# EAGLE board Shield-Proteco (EAGLE 8.0.1)
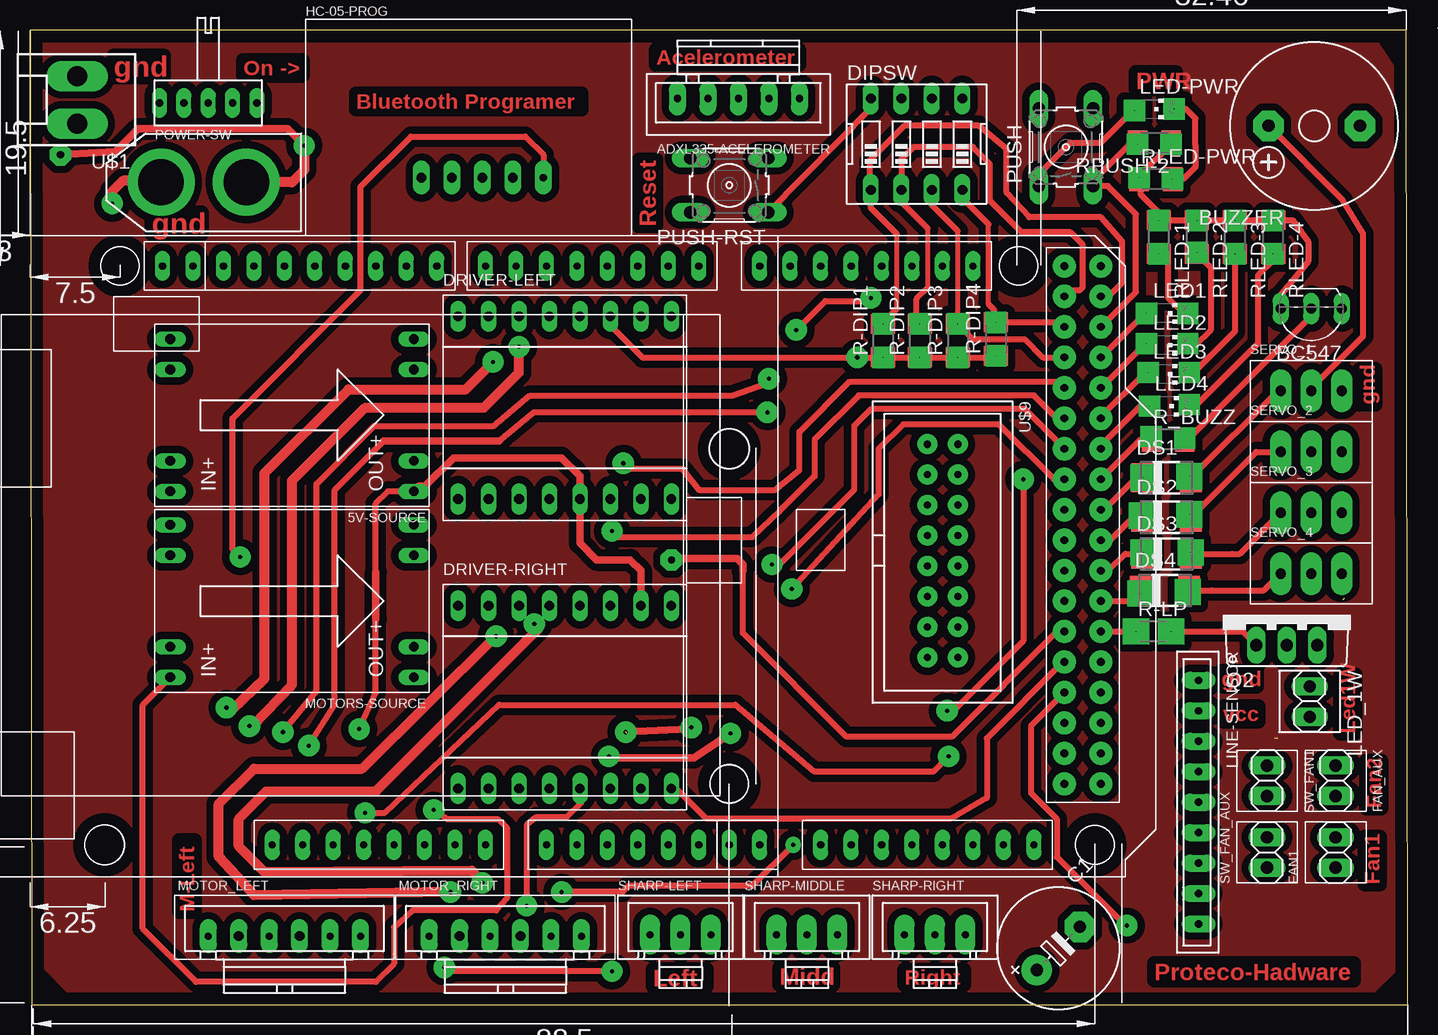
[diagram p0: board, top side]
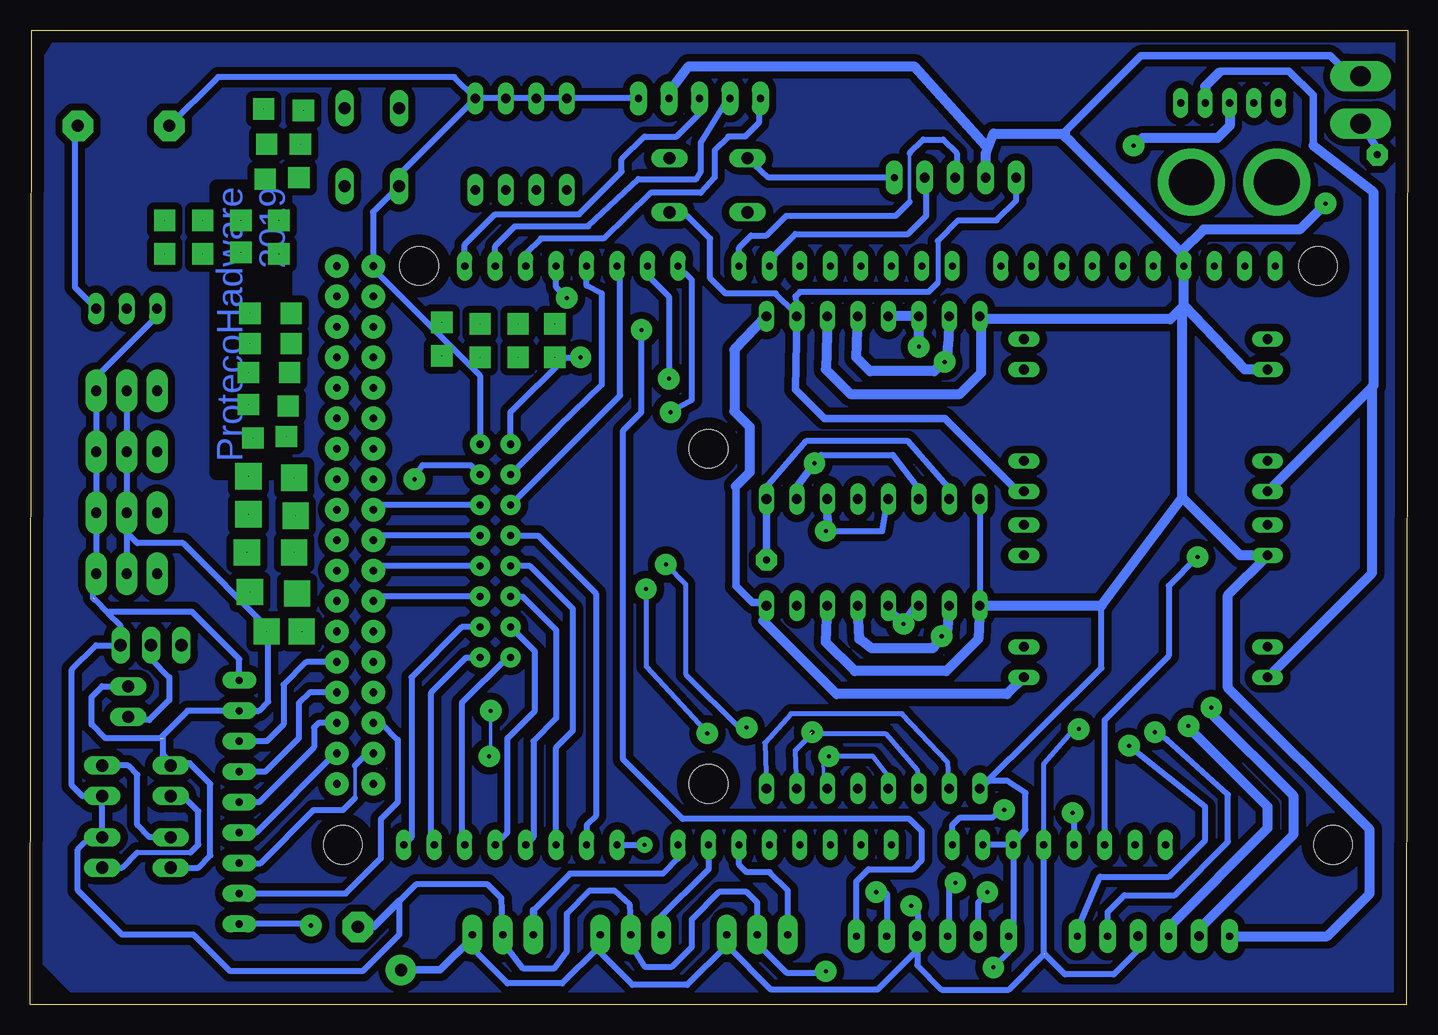
[diagram p1: board, bottom side, seen from below]

Size 114.86 x 81.27 mm. Coordinates in mm from the lower left corner, seen from the top.
Outline: 0.13,0 114.86,0 114.73,81.27 0,81.27 0.13,0
Copper layers (1*16): Top 0.035mm / dielectric 1.5mm / Bottom 0.035mm
Design rules "default": minimum track width 6mil, minimum drill 0.35mm, track to track 6mil, track to pad 6mil, pad to pad 6mil, via to via 6mil, smd to smd 6mil, copper to edge 40mil, drill to drill 6mil, minimum pad ring 10mil, minimum via ring 8mil, stop-mask expansion 4mil, vias tented up to drill 0mil, thermal gap 10mil

## Footprints (pad centres in the part's own frame; a part is rotated, then mirrored left to right if it is on the bottom)
STEPDOWN-DC-DC = drill 0.8 long: IN2+ -3.81,10.16; IN2- 6.35,10.16; IN+ -6.35,10.16; IN- 3.81,10.16; OUT2+ -3.81,-10.16; OUT2- 6.35,-10.16; OUT+ -6.35,-10.16; OUT- 3.81,-10.16
ACELEROMETER-MPU6050-JST-5 = drill 0.6 pad 1.422 long: GND -2.54,0; INT 5.08,0; SCL 0,0; SDA 2.54,0; VCC -5.08,0
ARDUINO-MEGA = drill 0.6 pad 1.27 long: 0-RX0 14.224,25.4; 1-TX0 11.684,25.4; 2 9.144,25.4; 3 6.604,25.4; 3V3 -13.716,-22.86; 4 4.064,25.4; 5 1.524,25.4; 5V_1 -11.176,-22.86; 6 -1.016,25.4; 7 -3.556,25.4; 8 -7.62,25.4; 9 -10.16,25.4; 10 -12.7,25.4; 11 -15.24,25.4; 12 -17.78,25.4; 13 -20.32,25.4; 14-TX3 19.304,25.4; 15-RX3 21.844,25.4; 16-TX2 24.384,25.4; 17-RX2 26.924,25.4; 18-TX1 29.464,25.4; 19-RX1 32.004,25.4; 20 34.544,25.4; 21 37.084,25.4; A0 1.524,-22.86; A1 4.064,-22.86; A2 6.604,-22.86; A3 9.144,-22.86; A4 11.684,-22.86; A5 14.224,-22.86; A6 16.764,-22.86; A7 19.304,-22.86; A8 24.384,-22.86; A9 26.924,-22.86; A10 29.464,-22.86; A11 32.004,-22.86; A12 34.544,-22.86; A13 37.084,-22.86; A14 39.624,-22.86; A15 42.164,-22.86; AREF -25.4,25.4; GND -22.86,25.4; GND_1 -6.096,-22.86; GND_2 -8.636,-22.86; IOREF -18.796,-22.86; NC -21.336,-22.86; RESET -16.256,-22.86; SCL -30.48,25.4; SDA -27.94,25.4; VIN -3.556,-22.86 | drill 0.65 pad 1.93: 5V_2 47.752,25.4; 5V_3 44.704,25.4; 22 44.704,22.86; 23 47.752,22.86; 24 44.704,20.32; 25 47.752,20.32; 26 44.704,17.78; 27 47.752,17.78; 28 44.704,15.24; 29 47.752,15.24; 30 44.704,12.7; 31 47.752,12.7; 32 44.704,10.16; 33 47.752,10.16; 34 44.704,7.62; 35 47.752,7.62; 36 44.704,5.08; 37 47.752,5.08; 38 44.704,2.54; 39 47.752,2.54; 40 44.704,0; 41 47.752,0; 42 44.704,-2.54; 43 47.752,-2.54; 44 44.704,-5.08; 45 47.752,-5.08; 46 44.704,-7.62; 47 47.752,-7.62; 48 44.704,-10.16; 49 47.752,-10.16; 50 44.704,-12.7; 51 47.752,-12.7; 52 44.704,-15.24; 53 47.752,-15.24; GND_3 47.752,-17.78; GND_4 44.704,-17.78 | hole 3.2: 47.244,-22.86; -34.036,25.4; 40.894,25.4; -35.306,-22.86; 16.764,10.16; 16.764,-17.78
TO92-CBE = drill 0.813 long: B 0,0; C -2.54,0; E 2.54,0
F/CM12P = drill 1.016 pad 2.54 octagon: + 3.81,0; - -3.81,0
E5-10,5 = drill 1.016 pad 2.54: + -2.54,0 | drill 1.016 pad 2.54 octagon: - 2.54,0
EDG-04 = drill 0.813 long: 1 -3.81,-3.81; 2 -1.27,-3.81; 3 1.27,-3.81; 4 3.81,-3.81; 5 3.81,3.81; 6 1.27,3.81; 7 -1.27,3.81; 8 -3.81,3.81
TB6612FNG = drill 0.8 long: AI1 6.35,3.81; AI2 6.35,6.35; AO1 -8.89,1.27; AO2 -8.89,-1.27; BI1 6.35,-1.27; BI2 6.35,-3.81; BO1 -8.89,-6.35; BO2 -8.89,-3.81; GND -8.89,3.81; GND_1 -8.89,-8.89; GND_2 6.35,-8.89; PWMA 6.35,8.89; PWMB 6.35,-6.35; STBY 6.35,1.27; VCC -8.89,6.35; VM -8.89,8.89
DO-214AC = smd 1.8 x 2.4: A 2.025,0; C -2.025,0
1X02 = drill 1.016 long: GND 1.27,0; VCC -1.27,0
HC-05-PROG-COMP = drill 0.8 pad 1.422 long: GND -1.27,-4.064; RXD 3.81,-4.064; TXD 1.27,-4.064; VCC -3.81,-4.064 | drill 0.6 pad 1.422 long: RESET 6.35,-4.064
CHIPLED_1206 = smd 1.5 x 1.5: A 0,-1.75; C 0,1.75
1X02' = drill 1.016 long: 1 -1.27,0; 2 1.27,0
CNY70-ARRAY-HEADER = drill 0.6 pad 1.422 long: GND -10.16,0; SCD 7.62,0; SCI -5.08,0; SF 10.16,0; SID 2.54,0; SII 0,0; SSD 5.08,0; SSI -2.54,0; VCC -7.62,0
JST = drill 0.6 pad 1.422 long: GND -6.35,0; M1 6.35,0; M2 3.81,0; OUTA -1.27,0 | drill 0.8 pad 1.422 long: OUTB -3.81,0; VCC 1.27,0
SLIDE-3 = drill 0.6 pad 1.27 long: COM 0,0; P1 -2.032,0; P2 2.032,0; P3 -4.064,0; P4 4.064,0
B3F-10XX = drill 1.016 long: 1 -3.251,2.261; 2 3.251,2.261; 3 -3.251,-2.261; 4 3.251,-2.261
TO220AV = drill 1.016 long: B -2.54,-2.54; C 0,-2.54; E 2.54,-2.54
M1206 = smd 1.6 x 2: 1 -1.4,0; 2 1.4,0
SERVO = drill 0.85 pad 1.778 long: GND 2.54,0; SIGNAL -2.54,0; VCC 0,0
SHARP = drill 0.6 pad 1.676 long: DIST -2.54,0; GND 0,0; VCC 2.54,0
KK-156-2 = drill 1.7 pad 2.184 long: GND 1.98,0; VCC -1.98,0
SENSOR-MISCELANEOUS = drill 0.6 pad 1.676: 3V3 -6.35,1.27; E1 -6.35,-1.27; E2 -3.81,1.27; E3 -3.81,-1.27; E4 -1.27,1.27; E5 -1.27,-1.27; E6 1.27,1.27; E7 1.27,-1.27; E8 3.81,1.27; E9 3.81,-1.27; E10 6.35,1.27; E11 6.35,-1.27; E12 8.89,1.27; E13 8.89,-1.27; GND -8.89,-1.27; VCC -8.89,1.27
TFT-ARDUINO-UNO-MEGA = drill 0.6 pad 1.27 long: 0-RX0 29.464,26.67; 1-TX0 26.924,26.67; 2 24.384,26.67; 3 21.844,26.67; 3V3 1.524,-21.59; 4 19.304,26.67; 5 16.764,26.67; 5V_1 4.064,-21.59; 6 14.224,26.67; 7 11.684,26.67; 8 7.62,26.67; 9 5.08,26.67; 10 2.54,26.67; 11 0,26.67; 12 -2.54,26.67; 13 -5.08,26.67; A0 16.764,-21.59; A1 19.304,-21.59; A2 21.844,-21.59; A3 24.384,-21.59; A4 26.924,-21.59; A5 29.464,-21.59; AREF -10.16,26.67; GND -7.62,26.67; GND_1 9.144,-21.59; GND_2 6.604,-21.59; IOREF -3.556,-21.59; NC -6.096,-21.59; RESET -1.016,-21.59; VIN 11.684,-21.59
XT60 = drill 3.81 pad 5.588: GND 7.112,0; VCC 0,0

## Placement (x,y rotation side)
5V-SOURCE  STEPDOWN-DC-DC  [STEPDOWN-DC-DC]  21.84,49.15 90 top
ADXL335-ACELEROMETER  ACELEROMETER-JST-5  [ACELEROMETER-MPU6050-JST-5]  59.05,75.57 180 top
ARDUINO-MEGA  ARDUINO_MEGA  [ARDUINO-MEGA]  41.53,36.2 0 top
BC547  [TO92-CBE]  106.81,58.04 180 top
BUZZER  F/CM12P  [F/CM12P]  107.06,73.28 180 top
C1  [E5-10,5]  85.72,4.7 45 top
DIPSW  [EDG-04]  73.91,71.76 0 top
DRIVER-LEFT  TB6612FNG  [TB6612FNG]  44.58,48.51 270 top
DRIVER-RIGHT  TB6612FNG  [TB6612FNG]  44.58,24.38 270 top
DS1  [DO-214AC]  94.74,43.94 0 top
DS2  [DO-214AC]  94.74,40.64 0 top
DS3  [DO-214AC]  94.74,37.59 0 top
DS4  [DO-214AC]  94.61,34.54 0 top
FAN1  FAN-MOLEX  [1X02]  108.84,12.7 90 top
FAN_AUX  FAN-MOLEX  [1X02]  108.84,18.67 270 top
HC-05-PROG  HC-05-PROGRAMER  [HC-05-PROG-COMP]  36.45,73.03 0 top
LED1  [CHIPLED_1206]  94.87,57.66 270 top
LED2  [CHIPLED_1206]  94.87,54.99 270 top
LED3  [CHIPLED_1206]  94.87,52.58 270 top
LED4  [CHIPLED_1206]  95,49.91 270 top
LED-PWR  [CHIPLED_1206]  93.73,74.68 270 top
LED_1W  LED-1W-3V3  [1X02']  106.68,25.27 270 top
LINE-SENSOR  CNY70-ARRAY-HEADER  [CNY70-ARRAY-HEADER]  97.41,16.89 270 top
MOTOR_LEFT  POLOLU-MICROMOTOR  [JST]  21.21,5.71 0 top
MOTOR_RIGHT  POLOLU-MICROMOTOR  [JST]  39.62,5.71 0 top
MOTORS-SOURCE  STEPDOWN-DC-DC  [STEPDOWN-DC-DC]  21.84,33.66 90 top
POWER-SW  SLIDE-3  [SLIDE-3]  14.86,75.18 0 top
PUSH  [B3F-10XX]  86.36,71.5 90 top
PUSH-RST  [B3F-10XX]  58.29,68.33 180 top
Q2  TIP41C  [TO220AV]  104.78,32.51 0 top
R-DIP1  [M1206]  71.12,55.37 90 top
R-DIP2  [M1206]  74.17,55.37 90 top
R-DIP3  [M1206]  77.34,55.37 90 top
R-DIP4  [M1206]  80.52,55.5 90 top
R-LP  [M1206]  93.6,31.11 0 top
R_BUZZ  [M1206]  94.87,47.12 0 top
RLED-1  [M1206]  94.11,64.01 270 top
RLED-2  [M1206]  97.28,64.01 270 top
RLED-3  [M1206]  100.46,64.01 270 top
RLED-4  [M1206]  103.63,64.01 270 top
RLED-PWR  [M1206]  93.85,68.83 0 top
RPUSH-2  [M1206]  93.73,71.88 180 top
SERVO_1  SERVOMOTORES  [SERVO]  106.81,51.18 0 top
SERVO_2  SERVOMOTORES  [SERVO]  106.81,46.1 0 top
SERVO_3  SERVOMOTORES  [SERVO]  106.81,41.02 0 top
SERVO_4  SERVOMOTORES  [SERVO]  106.81,35.94 0 top
SHARP-LEFT  SHARP  [SHARP]  54.23,5.84 0 top
SHARP-MIDDLE  SHARP  [SHARP]  64.77,5.84 0 top
SHARP-RIGHT  SHARP  [SHARP]  75.44,5.84 0 top
SW_FAN1  SW-HEAD  [1X02']  103.12,18.67 270 top
SW_FAN_AUX  SW-HEAD  [1X02']  103.12,12.7 90 top
U$1  LIPO7.4MOLEX  [KK-156-2]  3.94,75.44 90 top
U$9  SENSOR-MISCELANEOUS  [SENSOR-MISCELANEOUS]  76.07,37.85 270 top
U$14  TFT_ARDUINO-UNO-MEGA  [TFT-ARDUINO-UNO-MEGA]  26.29,34.92 0 top
U$23  ZIIPY-7.4V  [XT60]  18.03,68.58 180 top

## Library data of the parts
5V-SOURCE MOTORS-SOURCE = Reguladores
ADXL335-ACELEROMETER LINE-SENSOR SHARP-LEFT SHARP-MIDDLE SHARP-RIGHT U$9 = Sensores
ARDUINO-MEGA = Arduino
BC547 = transistor
BUZZER = buzzer; OC_FARNELL: unknown; OC_NEWARK: unknown
C1 = rcl
DIPSW = special
DRIVER-LEFT DRIVER-RIGHT = Driver-Motor
DS1-DS4 = diode
FAN1 FAN_AUX = Ventilador
HC-05-PROG = hc-xx
LED1-LED4 LED-PWR = led
LED_1W = LedPower
MOTOR_LEFT MOTOR_RIGHT SERVO_1-SERVO_4 = Motores
POWER-SW SW_FAN1 SW_FAN_AUX = Interruptores
PUSH PUSH-RST = switch-omron; MPN: B3F-1000; OC_FARNELL: 176432; OC_NEWARK: 36M3542
Q2 = transistor-power
R-DIP1-R-DIP4 R-LP R_BUZZ RLED-1-RLED-4 RLED-PWR RPUSH-2 = rcl; SPICEPREFIX: R
U$1 U$23 = Baterias
U$14 = TFT

## Nets
3V3: ARDUINO-MEGA.3V3 U$9.3V3 U$14.3V3
6V-DC-3A: DRIVER-LEFT.VM DRIVER-RIGHT.VM MOTORS-SOURCE.OUT+
A9: ARDUINO-MEGA.A9 U$9.E5
A10: ARDUINO-MEGA.A10 U$9.E7
A11: ARDUINO-MEGA.A11 U$9.E9
A12: ARDUINO-MEGA.A12 U$9.E11
A13: ARDUINO-MEGA.A13 U$9.E13
A14: ARDUINO-MEGA.A14 U$9.E12
A15: ARDUINO-MEGA.A15 U$9.E10
AREF: ARDUINO-MEGA.AREF U$14.AREF
BUZZER: ARDUINO-MEGA.35 R_BUZZ.1
D36: ARDUINO-MEGA.36 U$9.E2
D38: ARDUINO-MEGA.38 U$9.E4
D40: ARDUINO-MEGA.40 U$9.E6
D42: ARDUINO-MEGA.42 U$9.E8
DIP1: ARDUINO-MEGA.23 DIPSW.1 R-DIP1.2
DIP2: ARDUINO-MEGA.22 DIPSW.2 R-DIP2.2
DIP3: ARDUINO-MEGA.26 DIPSW.3 R-DIP3.2
DIP4: ARDUINO-MEGA.24 DIPSW.4 R-DIP4.2
ENC1-LEFT: ARDUINO-MEGA.14-TX3 MOTOR_LEFT.M1
ENC1-RIGHT: ARDUINO-MEGA.18-TX1 MOTOR_RIGHT.M1
ENC2-LEFT: ARDUINO-MEGA.15-RX3 MOTOR_LEFT.M2
ENC2-RIGHT: ARDUINO-MEGA.A8 MOTOR_RIGHT.M2
GND: 5V-SOURCE.IN- ADXL335-ACELEROMETER.GND ARDUINO-MEGA.GND ARDUINO-MEGA.GND_1 ARDUINO-MEGA.GND_2 BC547.E C1.- DRIVER-LEFT.GND DRIVER-LEFT.GND_1 DRIVER-LEFT.GND_2 DRIVER-RIGHT.GND DRIVER-RIGHT.GND_1 DRIVER-RIGHT.GND_2 FAN1.GND FAN_AUX.GND HC-05-PROG.GND LINE-SENSOR.GND MOTOR_LEFT.GND MOTOR_RIGHT.GND MOTORS-SOURCE.IN- Q2.E R-DIP1.1 R-DIP2.1 R-DIP3.1 R-DIP4.1 RLED-1.1 RLED-2.1 RLED-3.1 RLED-4.1 RLED-PWR.1 RPUSH-2.1 SERVO_1.GND SERVO_2.GND SERVO_3.GND SERVO_4.GND SHARP-LEFT.GND SHARP-MIDDLE.GND SHARP-RIGHT.GND U$1.GND U$9.GND U$14.GND U$14.GND_1 U$14.GND_2 U$23.GND
IN1-MOTOR-LEFT: ARDUINO-MEGA.30 DRIVER-LEFT.AI1 DRIVER-LEFT.BI1
IN1-MOTOR-RIGHT: ARDUINO-MEGA.32 DRIVER-RIGHT.AI2 DRIVER-RIGHT.BI2
IN2-MOTOR-LEFT: ARDUINO-MEGA.28 DRIVER-LEFT.AI2 DRIVER-LEFT.BI2
IN2-MOTOR-RIGHT: ARDUINO-MEGA.34 DRIVER-RIGHT.AI1 DRIVER-RIGHT.BI1
INT: ADXL335-ACELEROMETER.INT ARDUINO-MEGA.19-RX1
IOREF: ARDUINO-MEGA.IOREF U$14.IOREF
LCD_CS: ARDUINO-MEGA.A3 U$14.A3
LCD_D0: ARDUINO-MEGA.8 U$14.8
LCD_D1: ARDUINO-MEGA.9 U$14.9
LCD_D2: ARDUINO-MEGA.2 U$14.2
LCD_D3: ARDUINO-MEGA.3 U$14.3
LCD_D4: ARDUINO-MEGA.4 U$14.4
LCD_D5: ARDUINO-MEGA.5 U$14.5
LCD_D6: ARDUINO-MEGA.6 U$14.6
LCD_D7: ARDUINO-MEGA.7 U$14.7
LCD_RD: ARDUINO-MEGA.A0 U$14.A0
LCD_RS: ARDUINO-MEGA.A2 U$14.A2
LCD_RST: ARDUINO-MEGA.A4 U$14.A4
LCD_WR: ARDUINO-MEGA.A1 U$14.A1
LED1: ARDUINO-MEGA.27 LED1.A
LED1W: ARDUINO-MEGA.45 R-LP.1
LED2: ARDUINO-MEGA.29 LED2.A
LED3: ARDUINO-MEGA.31 LED3.A
LED4: ARDUINO-MEGA.33 LED4.A
N$1: LED_1W.2 Q2.C
N$2: Q2.B R-LP.2
N$5: BC547.C BUZZER.-
N$6: BC547.B R_BUZZ.2
N$15: FAN_AUX.VCC SW_FAN_AUX.2
N$23: LED1.C RLED-1.2
N$24: LED2.C RLED-2.2
N$25: LED3.C RLED-3.2
N$26: LED4.C RLED-4.2
N$75: DS4.A SERVO_4.SIGNAL
N$76: DS3.A SERVO_3.SIGNAL
N$77: DS2.A SERVO_2.SIGNAL
N$89: LED-PWR.C RLED-PWR.2
N$127: DS1.A SERVO_1.SIGNAL
N$128: FAN1.VCC SW_FAN1.2
N$134: POWER-SW.COM U$1.VCC U$23.VCC
NC: ARDUINO-MEGA.NC U$14.NC
OUT1-MOTOR-LEFT: DRIVER-LEFT.AO1 DRIVER-LEFT.BO1 MOTOR_LEFT.OUTB
OUT1-MOTOR-RIGHT: DRIVER-RIGHT.AO1 DRIVER-RIGHT.BO1 MOTOR_RIGHT.OUTB
OUT2-MOTOR-LEFT: DRIVER-LEFT.AO2 DRIVER-LEFT.BO2 MOTOR_LEFT.OUTA
OUT2-MOTOR-RIGHT: DRIVER-RIGHT.AO2 DRIVER-RIGHT.BO2 MOTOR_RIGHT.OUTA
PUSH: ARDUINO-MEGA.25 PUSH.3 RPUSH-2.2
PWM-MOTOR-LEFT: ARDUINO-MEGA.44 DRIVER-LEFT.PWMA DRIVER-LEFT.PWMB
PWM-MOTOR-RIGHT: ARDUINO-MEGA.46 DRIVER-RIGHT.PWMA DRIVER-RIGHT.PWMB
RESET: ARDUINO-MEGA.RESET HC-05-PROG.RESET PUSH-RST.4 U$14.RESET
RX0: ARDUINO-MEGA.0-RX0 HC-05-PROG.TXD U$14.0-RX0
RX2: ARDUINO-MEGA.17-RX2 U$9.E1
SCD: ARDUINO-MEGA.50 LINE-SENSOR.SCD
SCI: ARDUINO-MEGA.47 LINE-SENSOR.SCI
SCL: ADXL335-ACELEROMETER.SCL ARDUINO-MEGA.21
SD_DI: ARDUINO-MEGA.11 U$14.11
SD_DO: ARDUINO-MEGA.12 U$14.12
SD_SCK: ARDUINO-MEGA.13 U$14.13
SD_SS: ARDUINO-MEGA.10 U$14.10
SDA: ADXL335-ACELEROMETER.SDA ARDUINO-MEGA.20
SERVO1: ARDUINO-MEGA.37 DS1.C
SERVO2: ARDUINO-MEGA.39 DS2.C
SERVO3: ARDUINO-MEGA.41 DS3.C
SERVO4: ARDUINO-MEGA.43 DS4.C
SF: ARDUINO-MEGA.48 LINE-SENSOR.SF
SHARP-LEFT: ARDUINO-MEGA.A5 SHARP-LEFT.DIST U$14.A5
SHARP-MIDDLE: ARDUINO-MEGA.A6 SHARP-MIDDLE.DIST
SHARP-RIGHT: ARDUINO-MEGA.A7 SHARP-RIGHT.DIST
SID: ARDUINO-MEGA.53 LINE-SENSOR.SID
SII: ARDUINO-MEGA.51 LINE-SENSOR.SII
SSD: ARDUINO-MEGA.52 LINE-SENSOR.SSD
SSI: ARDUINO-MEGA.49 LINE-SENSOR.SSI
TX0: ARDUINO-MEGA.1-TX0 HC-05-PROG.RXD U$14.1-TX0
TX2: ARDUINO-MEGA.16-TX2 U$9.E3
VCC: 5V-SOURCE.OUT+ ADXL335-ACELEROMETER.VCC ARDUINO-MEGA.5V_1 BUZZER.+ C1.+ DIPSW.5 DIPSW.6 DIPSW.7 DIPSW.8 DRIVER-LEFT.STBY DRIVER-LEFT.VCC DRIVER-RIGHT.STBY DRIVER-RIGHT.VCC HC-05-PROG.VCC LED-PWR.A LED_1W.1 LINE-SENSOR.VCC MOTOR_LEFT.VCC MOTOR_RIGHT.VCC PUSH-RST.1 PUSH.1 SERVO_1.VCC SERVO_2.VCC SERVO_3.VCC SERVO_4.VCC SHARP-LEFT.VCC SHARP-MIDDLE.VCC SHARP-RIGHT.VCC SW_FAN1.1 SW_FAN_AUX.1 U$9.VCC U$14.5V_1
VIN: 5V-SOURCE.IN+ ARDUINO-MEGA.VIN MOTORS-SOURCE.IN+ POWER-SW.P2 U$14.VIN

## Tracks (layer width: path | path; a pad name or v marks a point on that pad's centre or on a via)
3V3  (via drill 0.35 pad 1.78)
  Top 0.305: 76.96,24.51 v76.45,24.51 76.33,24.51
  Top 0.508: v27.94,16 29.59,16 39.12,25.02 58.8,25.02 65.41,19.43 75.31,19.43 v76.58,20.7 | v82.8,43.81 82.8,30.35 76.96,24.51
  Bottom 0.305: 28.07,15.88 v27.94,16 | 82.8,44.07 v82.8,43.81 | v76.45,24.51 76.45,20.83 v76.58,20.7
  Bottom 0.508: U$14.3V3 27.81,15.62 28.07,15.88 | 82.8,44.07 82.17,44.96 78.11,44.96 U$9.3V3
6V-DC-3A
  Bottom 0.61: 56.01,43.24 56.01,34.92 54.61,33.53 53.72,33.53 | 53.72,33.53 DRIVER-RIGHT.VM | DRIVER-RIGHT.VM 53.72,33.53 | DRIVER-RIGHT.VM 53.47,32.26 53.72,32
  Bottom 0.813: 53.72,32 47.62,25.91 33.4,25.91 MOTORS-SOURCE.OUT+ | DRIVER-LEFT.VM 56.13,54.61 56.13,49.47 54.86,48.2 54.86,44.38 56.01,43.24
A9
  Bottom 0.508: U$9.E5 72.52,39.12 67.69,34.29 67.69,15.75 68.45,14.99 ARDUINO-MEGA.A9
A10
  Bottom 0.508: ARDUINO-MEGA.A10 70.99,21.46 69.6,22.86 69.6,33.02 73.15,36.58 U$9.E7
A11
  Bottom 0.508: U$9.E9 73.79,34.04 70.99,31.24 70.99,23.88 72.9,21.97 72.9,13.97 ARDUINO-MEGA.A11
A12
  Bottom 0.508: U$9.E11 72.77,29.46 72.77,24.51 75.06,22.22 75.06,14.35 ARDUINO-MEGA.A12
A13
  Bottom 0.305: U$9.E13 75.06,28.96
  Bottom 0.508: 75.06,28.96 78.87,25.15 78.87,13.59 ARDUINO-MEGA.A13
A14
  Bottom 0.305: ARDUINO-MEGA.A14 81.41,13.59
  Bottom 0.508: 81.41,13.59 81.41,26.04 78.49,28.96 U$9.E12
A15
  Bottom 0.508: ARDUINO-MEGA.A15 83.06,13.97 83.06,27.3 78.87,31.5 U$9.E10
BUZZER
  Top 0.305: 92.58,47.12 R_BUZZ.1
  Top 0.508: ARDUINO-MEGA.35 92.58,47.12
D36
  Bottom 0.305: 85.85,41.66 ARDUINO-MEGA.36
  Bottom 0.508: U$9.E2 85.85,41.66
D38
  Bottom 0.305: 85.85,39.12 ARDUINO-MEGA.38
  Bottom 0.508: U$9.E4 85.85,39.12
D40
  Bottom 0.305: 85.85,36.58 ARDUINO-MEGA.40
  Bottom 0.508: U$9.E6 85.85,36.58
D42
  Bottom 0.305: 85.85,34.04 ARDUINO-MEGA.42
  Bottom 0.508: U$9.E8 85.85,34.04
DIP1
  Top 0.152: 69.98,68.07 DIPSW.1
  Top 0.305: R-DIP1.2 71.5,57.15 71.5,57.28 | ARDUINO-MEGA.23 89.92,59.05
  Top 0.406: 72.26,58.04 72.26,64.26
  Top 0.508: 71.5,57.28 72.26,58.04 | 72.26,64.26 70.1,66.42 DIPSW.1 | 69.98,68.07 69.98,70.36 72.9,73.28 79.12,73.28 81.41,71.37 81.41,67.69 83.31,65.66 89.28,65.66 91.06,63.63 91.06,60.2 89.92,59.05
DIP2
  Top 0.305: R-DIP2.2 73.91,57.03 | ARDUINO-MEGA.22 86.74,59.56
  Top 0.406: 74.85,59.81 74.85,64.72
  Top 0.508: 73.91,57.03 73.91,58.87 74.85,59.81 | 74.85,64.72 72.64,66.93 DIPSW.2 72.64,70.48 73.66,71.5 78.61,71.5 80.01,70.1 80.01,67.06 82.65,64.41 86.72,64.41 87.76,63.37 87.76,59.82 87.5,59.56 86.74,59.56
DIP3
  Top 0.152: R-DIP3.2 77.47,56.77
  Top 0.406: R-DIP3.2 77.34,64.52
  Top 0.508: 77.34,64.52 75.18,66.68 DIPSW.3 | R-DIP3.2 78.62,55.5 82.93,55.5 84.45,53.98 ARDUINO-MEGA.26
DIP4
  Top 0.152: ARDUINO-MEGA.24 86.11,56.52 85.34,56.52
  Top 0.305: R-DIP4.2 80.39,57.03 | 85.72,56.9 86.11,56.52 | 77.72,67.25 DIPSW.4
  Top 0.406: 79.91,58.42 79.91,65.06
  Top 0.508: 79.91,65.06 77.72,67.25 | 80.39,57.03 80.39,57.93 79.91,58.42 | R-DIP4.2 85.72,56.9
ENC1-LEFT  (via drill 0.35 pad 1.78)
  Top 0.305: 61.21,49.4 v61.47,49.4
  Top 0.508: v23.24,21.59 25.4,25.02 25.4,42.93 29.46,46.99 | 39.12,46.99 42.04,49.4 61.21,49.4
  Top 0.61: 29.46,46.99 39.12,46.99
  Bottom 0.305: v61.47,49.4 61.59,49.4
  Bottom 0.508: MOTOR_LEFT.M1 27.18,7.11 25.65,10.67 19.94,10.67 16.89,13.72 16.89,16.51 v23.24,21.59 | 61.59,49.4 59.69,50.42 59.69,60.45 ARDUINO-MEGA.14-TX3
ENC1-RIGHT  (via drill 0.35 pad 1.78)
  Top 0.305: 70.1,58.67 v70.1,58.93
  Top 0.508: v63.88,56.26 66.29,58.67 70.1,58.67
  Bottom 0.305: 70.99,60.58 ARDUINO-MEGA.18-TX1
  Bottom 0.508: 70.99,60.58 70.99,59.82 v70.1,58.93 | MOTOR_RIGHT.M1 45.97,10.29 44.96,11.3 41.27,11.3 40.51,12.07 40.51,14.48 41.53,15.49 60.45,15.49 65.41,20.45 65.41,47.88 63.88,49.4 63.88,55.5 v63.88,56.26
ENC2-LEFT  (via drill 0.35 pad 1.78)
  Top 0.305: 61.47,51.82 v61.59,52.2
  Top 0.508: v21.08,22.73 23.88,26.16 23.88,43.43 28.7,48.26 38.63,48.26 41.65,50.77 58.52,50.77 61.47,51.82
  Bottom 0.305: 63.37,60.83 ARDUINO-MEGA.15-RX3
  Bottom 0.508: MOTOR_LEFT.M2 25.02,7.75 23.62,9.14 19.43,9.14 14.99,13.59 14.99,17.53 20.07,22.1 v21.08,22.73 | 63.37,60.83 61.59,59.05 v61.59,52.2 61.59,52.07
ENC2-RIGHT  (via drill 0.35 pad 1.3, 0.35 pad 1.78)
  Top 0.508: v63.63,13.34 60.2,9.91 49.91,9.91 49.4,9.4 v44.32,9.4
  Bottom 0.305: 63.88,13.34 63.75,13.21 v63.63,13.34 | 43.43,6.98 MOTOR_RIGHT.M2 | v44.32,9.4 43.43,9.27
  Bottom 0.508: ARDUINO-MEGA.A8 63.88,13.34 | 43.43,9.27 43.43,6.98
GND  (via drill 0.35 pad 1.78)  (1 unrouted)
  Top 0.305: RLED-4.1 | 104.14,59.05 104.14,58.17 BC547.E | RLED-1.1 94.11,66.04 | RLED-PWR.1 92.58,68.71 92.58,69.21 | 80.39,53.97 R-DIP4.1 | R-DIP1.1 | DRIVER-LEFT.GND 48.51,56.52 | 34.86,2.79 v34.54,3.11 | RPUSH-2.1 95.13,71.76
  Top 0.508: RLED-1.1 RLED-2.1 RLED-3.1 RLED-4.1 | RLED-4.1 105.28,65.41 106.55,63.63 106.55,61.98 104.14,59.05 | 94.11,66.04 92.58,67.56 92.58,68.71 | 95.13,71.76 92.58,69.21 | R-DIP1.1 R-DIP2.1 R-DIP3.1 80.39,53.97 | R-DIP1.1 v68.96,53.98 51.05,53.98 48.51,56.52 | v48.51,2.79 34.86,2.79 | U$23.GND 10.8,68.71
  Top 0.813: v6.86,66.8 6.86,67.82 7.75,68.71 10.8,68.71
  Bottom 0.305: 35.18,71.63 HC-05-PROG.GND | 18.92,62.74 18.67,62.48 | 107.31,30.86 Q2.E | 35.43,17.4 DRIVER-RIGHT.GND_2 | SERVO_1.GND 109.35,52.7 108.97,52.7 | 104.27,57.4 BC547.E | 32.89,6.1 MOTOR_RIGHT.GND 33.27,4.38 | 48.9,2.67 48.77,2.79 v48.51,2.79 | FAN1.GND 108.84,14.1
  Bottom 0.508: DRIVER-LEFT.GND_2 DRIVER-RIGHT.GND_1 | ADXL335-ACELEROMETER.GND 61.59,76.07 | 28.57,72.64 28,71.82 | SERVO_1.GND SERVO_2.GND SERVO_3.GND SERVO_4.GND 109.6,35.69 109.6,33.91 | 108.33,32.64 109.47,33.78 | U$14.GND_2 U$14.GND_1 | 25.53,33.27 25.53,28.07 DRIVER-RIGHT.GND_2 34.93,18.67 33.4,18.67 31.88,17.65 31.88,14.61 U$14.GND_2 | 108.97,52.7 104.27,57.4 | U$14.GND_2 32.89,6.1 | 48.9,2.67 51.82,2.67 54.23,5.08 SHARP-LEFT.GND 54.23,8.51 55.12,9.4 57.4,9.4 59.69,7.11 59.69,4.83 61.34,3.17 63.63,3.17 64.77,4.95 SHARP-MIDDLE.GND 64.9,8.38 66.17,9.52 68.2,9.52 70.1,7.62 70.1,4.45 71.12,3.05 73.79,3.05 75.18,4.83 SHARP-RIGHT.GND 75.56,8.89 76.71,10.03 82.68,10.03 84.07,8.64 84.07,5.84 87.12,2.79 98.17,2.79 101.22,5.84 107.19,5.84 110.87,9.52 110.87,12.95 109.73,14.1 108.84,14.1 FAN_AUX.GND 110.49,17.4 111.38,18.29 111.38,27.94 109.35,29.97 Q2.E 107.31,31.62 108.33,32.64 | v34.54,3.11 33.27,4.38 | LINE-SENSOR.GND 97.41,28.83 101.35,32.77 108.2,32.77 108.33,32.64 | v68.96,53.98 70.23,53.98 74.8,49.4 U$9.GND
  Bottom 0.61: 18.67,62.48 18.67,62.87 | 18.8,58.17 18.67,58.29 | 35.56,57.15 DRIVER-LEFT.GND_1 | C1.- 86.22,6.5 84.07,8.64 | U$1.GND 4.77,77.42 6.48,79.12 22.25,79.12 28.78,72.59
  Bottom 0.813: 18.67,62.48 U$14.GND 18.67,58.29 13.59,52.96 5V-SOURCE.IN- | 18.8,42.29 13.97,37.46 MOTORS-SOURCE.IN- 14.99,34.16 14.99,26.42 3.18,14.61 3.18,9.27 6.73,5.71 MOTOR_LEFT.GND | 18.8,42.29 18.8,58.17 19.81,57.15 35.56,57.15 35.56,52.7 37.34,50.93 46.48,50.93 48.51,52.96 DRIVER-LEFT.GND | 61.59,76.07 59.94,78.23 41.15,78.23 35.18,71.63 | HC-05-PROG.GND 35.18,70.99 34.54,72.64 28.57,72.64 | 18.8,42.29 25.53,33.27 DRIVER-RIGHT.GND_1 35.81,30.48 38.48,27.81 46.1,27.81 48.51,30.23 DRIVER-RIGHT.GND | v6.86,66.8 9.02,64.64 17.02,64.64 18.92,62.74 28,71.82 28.78,72.59
GND2
  pour Bottom (isolate 0.61): 0.51,80.9 112.52,80.9 114.81,77.22 114.81,4.45 110.36,0 2.16,0 0.13,2.03 0.13,79.12
GND3
  pour Top (isolate 0.61): 0.51,81.03 111.76,81.03 114.81,76.45 114.81,3.81 111,0 4.19,0 0.25,3.94 0.25,79.25
IN1-MOTOR-LEFT  (via drill 0.35 pad 1.78)
  Top 0.305: v48.51,39.5 49.02,38.99 | 83.69,50.8 83.57,50.8 | 85.6,48.89 ARDUINO-MEGA.30
  Top 0.508: 49.02,38.99 60.2,38.99 62.48,41.15 65.41,44.07 65.41,47.12 69.09,50.8 83.69,50.8 85.6,48.89
  Bottom 0.305: 48.39,40.13 v48.51,39.5
  Bottom 0.508: DRIVER-LEFT.AI1 48.51,42.04 48.13,39.5 43.81,39.5 43.31,42.55 DRIVER-LEFT.BI1 43.31,41.91
  Bottom 0.61: 48.51,42.04 48.39,40.13
IN1-MOTOR-RIGHT  (via drill 0.35 pad 1.78)  (1 unrouted)
  Top 0.305: 61.72,36.58 v61.85,36.7 62.48,36.7 | v55.12,23.11 54.99,22.99
  Top 0.508: ARDUINO-MEGA.32 82.93,49.66 70.1,49.66 68.71,48.26 68.71,42.93 62.48,36.7
  Top 0.61: 54.99,22.99 v49.66,22.73
  Bottom 0.305: 55.75,23.11 v55.12,23.11
  Bottom 0.406: DRIVER-RIGHT.AI2 51.05,21.21 49.91,22.35 49.78,22.35 49.78,22.61 43.56,22.61 40.89,19.56 DRIVER-RIGHT.BI2 | v61.85,36.7 60.2,35.05 60.2,27.56 55.75,23.11
IN2-MOTOR-LEFT  (via drill 0.35 pad 1.78)
  Top 0.305: 85.72,51.94 ARDUINO-MEGA.28 | v49.47,45.15 49.91,44.7
  Top 0.508: 49.91,44.7 54.36,44.7 55.75,42.93 62.1,42.93 64.13,44.58 64.13,47.75 68.33,51.94 85.72,51.94
  Bottom 0.508: DRIVER-LEFT.BI2 40.89,43.18 42.93,45.85 48.9,45.85 v49.47,45.15
  Bottom 0.61: DRIVER-LEFT.AI2 51.05,43.05 v49.47,45.15
IN2-MOTOR-RIGHT  (via drill 0.35 pad 1.78)
  Top 0.305: ARDUINO-MEGA.34 85.34,43.81 | 48.36,20.6 v48.26,20.7
  Top 0.508: 85.34,43.81 80.77,48.39 72.77,48.39 70.74,46.35 70.74,42.55 v63.5,34.67
  Top 0.61: 48.36,20.6 55.35,20.6 v58.4,22.63
  Bottom 0.305: 48.51,17.53 DRIVER-RIGHT.AI1 48.64,17.91 48.77,20.19 v48.26,20.7 | 58.57,22.88 v58.4,22.63
  Bottom 0.406: v48.26,20.7 44.58,20.7 43.31,19.05 DRIVER-RIGHT.BI1 43.31,17.91 | v63.5,34.67 63.5,28.19 58.57,22.88
INT
  Bottom 0.305: 73.53,62.61 ARDUINO-MEGA.19-RX1 | ADXL335-ACELEROMETER.INT 54.1,75.57
  Bottom 0.508: 54.1,75.57 54.1,73.53 55.24,72.39 56.64,72.39 57.79,71.25 57.79,68.96 58.93,67.69 63.12,67.69 67.06,63.88 72.26,63.88 73.53,62.61
LED1  (via drill 0.03 pad 1.78)
  Top 0.305: 92.96,57.66 v93.09,57.66 LED1.A
  Top 0.508: ARDUINO-MEGA.27 92.96,57.66
LED1W
  Top 0.508: ARDUINO-MEGA.45 R-LP.1
LED2
  Top 0.305: 92.84,54.99 LED2.A
  Top 0.508: ARDUINO-MEGA.29 92.84,54.99
LED3
  Top 0.305: 92.84,52.58 LED3.A | ARDUINO-MEGA.31 89.28,49.02
  Top 0.508: 89.28,49.02 92.84,52.58
LED4
  Top 0.305: LED4.A 92.58,49.91 | ARDUINO-MEGA.33 89.28,46.61
  Top 0.508: 89.28,46.61 92.58,49.91
N$1
  Bottom 0.305: 106.43,23.75 LED_1W.2
  Bottom 0.508: Q2.C 104.78,28.83 103.25,27.3 103.25,25.4 104.9,23.75 106.43,23.75
N$2  (via drill 0.03 pad 2.18)
  Top 0.508: R-LP.2 v95.12,31.11 97.54,31.11 101.09,31.11 Q2.B
N$3  (via drill 0.03 pad 1.78)
  other vias: 71.12,56.77
N$4  (via drill 0.03 pad 1.78)
  other vias: 71.12,53.98
N$5
  Bottom 0.305: BUZZER.- 111.12,73.03
  Bottom 0.508: 111.12,73.03 111.12,59.82 BC547.C
N$6
  Top 0.305: 96.52,47.12 R_BUZZ.2
  Top 0.508: 96.52,47.12 106.81,57.4 BC547.B
N$7  (via drill 0.03 pad 1.78)
  other vias: 74.17,53.98
N$8  (via drill 0.03 pad 1.78)
  other vias: 74.17,56.77
N$9  (via drill 0.03 pad 1.78)
  other vias: 77.34,56.77
N$10  (via drill 0.03 pad 1.78)
  other vias: 77.34,53.98
N$11  (via drill 0.03 pad 1.78)
  other vias: 80.52,56.9
N$12  (via drill 0.03 pad 1.78)
  other vias: 80.52,54.1
N$13  (via drill 0.03 pad 1.78)
  other vias: 93.09,55.12
N$14  (via drill 0.03 pad 1.78)
  other vias: 96.52,55.12
N$15
  Bottom 0.508: SW_FAN_AUX.2 104.9,13.97 105.92,14.99 105.92,19.18 106.68,19.94 FAN_AUX.VCC
N$16  (via drill 0.03 pad 1.78)
  other vias: 94.11,65.41
N$17  (via drill 0.03 pad 1.78)
  other vias: 94.11,62.61
N$18  (via drill 0.03 pad 1.78)
  other vias: 97.28,62.74
N$19  (via drill 0.03 pad 1.78)
  other vias: 97.28,65.41
N$20  (via drill 0.03 pad 1.78)
  other vias: 100.46,65.41
N$21  (via drill 0.03 pad 1.78)
  other vias: 100.46,62.61
N$22  (via drill 0.03 pad 1.78)
  other vias: 103.63,62.61
N$23  (via drill 0.03 pad 1.78)
  Top 0.305: 94.87,61.72 94.11,62.48 RLED-1.2
  Top 0.508: 94.87,61.72 94.87,58.93 96.14,57.66 v96.52,57.66 LED1.C
N$24
  Top 0.305: 97.16,54.99 LED2.C
  Top 0.508: RLED-2.2 98.42,61.46 98.42,56.26 97.16,54.99
N$25
  Top 0.305: 97.41,53.09 97.13,53.09 LED3.C
  Top 0.508: RLED-3.2 100.46,56.13 97.41,53.09
N$26
  Top 0.305: RLED-4.2 103.63,62.1 | 97.16,49.91 LED4.C
  Top 0.508: 103.63,62.1 102.36,60.83 102.36,55.12 97.16,49.91
N$27  (via drill 0.03 pad 1.78)
  other vias: 103.63,65.41
N$28  (via drill 0.03 pad 1.78)
  other vias: 92.46,68.96
N$29  (via drill 0.03 pad 1.78)
  other vias: 95.25,68.83
N$30  (via drill 0.03 pad 1.78)
  other vias: 95.12,71.76
N$31  (via drill 0.03 pad 1.78)
  other vias: 92.33,71.76
N$32  (via drill 0.03 pad 1.78)
  other vias: 92.08,74.55
N$33  (via drill 0.03 pad 1.78)
  other vias: 95.38,74.68
N$34  (via drill 0.03 pad 1.78)
  other vias: 96.65,52.7
N$35  (via drill 0.03 pad 1.78)
  other vias: 93.22,52.7
N$36  (via drill 0.03 pad 1.78)
  other vias: 93.34,49.91
N$37  (via drill 0.03 pad 1.78)
  other vias: 96.65,50.04
N$38  (via drill 0.03 pad 1.78)
  other vias: 96.27,47.24
N$39  (via drill 0.03 pad 1.78)
  other vias: 93.47,47.37
N$40  (via drill 0.03 pad 2.18)
  other vias: 92.84,43.94
N$41  (via drill 0.03 pad 2.18)
  other vias: 96.65,44.07
N$42  (via drill 0.03 pad 2.18)
  other vias: 92.71,40.77
N$43  (via drill 0.03 pad 2.18)
  other vias: 96.65,40.89
N$44  (via drill 0.03 pad 2.18)
  other vias: 92.84,37.72
N$45  (via drill 0.03 pad 2.18)
  other vias: 96.77,37.72
N$46  (via drill 0.03 pad 2.18)
  other vias: 92.58,34.29
N$47  (via drill 0.03 pad 2.18)
  other vias: 96.52,34.42
N$48  (via drill 0.03 pad 2.18)
  other vias: 92.2,31.11
N$75
  Top 0.508: DS4.A 98.55,34.54 102.87,34.54 SERVO_4.SIGNAL
N$76
  Top 0.508: DS3.A 100.2,37.59 100.84,37.59 SERVO_3.SIGNAL
N$77
  Top 0.508: DS2.A 102.23,46.1 SERVO_2.SIGNAL
N$89
  Top 0.508: LED-PWR.C 96.39,74.68 97.16,73.91 97.16,71.63 97.16,69.85 96.14,68.83 RLED-PWR.2
N$127
  Top 0.305: 104.01,51.18 SERVO_1.SIGNAL
  Top 0.508: DS1.A 104.01,51.18
N$128
  Bottom 0.305: 102.36,17.65 102.62,17.4 SW_FAN1.2
  Bottom 0.406: 105.92,12.7 101.47,12.7
  Bottom 0.508: FAN1.VCC 107.19,11.43 105.92,12.7 | 101.47,12.7 100.84,13.34 100.84,16.13 102.36,17.65
N$134  (via drill 0.35 pad 1.78, 0.6 pad 1.78)
  Top 0.61: v2.54,70.87 7.11,71.12 9.02,73.03 21.46,73.03 v22.86,71.63
  Top 0.813: U$23.VCC 21.84,68.58 22.86,69.6 v22.86,71.63
  Bottom 0.508: 22.73,71.63 v22.86,71.63
  Bottom 0.61: U$1.VCC 3.86,73.46 2.54,71.37 v2.54,70.87
  Bottom 0.813: POWER-SW.COM 14.86,73.28 15.88,72.26 22.1,72.26 22.73,71.63
OUT1-MOTOR-LEFT  (via drill 0.35 pad 1.78)
  Top 0.305: 16.89,24.64 v16.38,24.77
  Top 0.813: 16.89,24.64 19.56,27.18 19.56,44.32 26.54,51.31 36.32,51.31 v38.61,53.59
  Bottom 0.305: v38.61,53.59 38.61,53.72
  Bottom 0.813: DRIVER-LEFT.BO1 38.35,54.86 38.35,53.98 38.61,53.72 39.5,52.83 44.83,52.83 45.97,53.98 DRIVER-LEFT.AO1 | MOTOR_LEFT.OUTB 17.4,6.35 9.52,14.22 9.52,17.4 16.51,24.38 v16.38,24.77
OUT1-MOTOR-RIGHT  (via drill 0.35 pad 1.78)
  Top 0.813: v35.05,9.4 18.67,9.14 15.75,12.32 15.75,16.76 18.67,19.68 27.69,19.68 v38.86,30.73
  Bottom 0.305: 45.85,33.02 DRIVER-RIGHT.AO1 | 38.99,30.99 v38.86,30.73
  Bottom 0.508: MOTOR_RIGHT.OUTB 35.81,8.51 35.31,9.14 v35.05,9.4
  Bottom 0.61: v38.86,30.73 38.35,30.73 38.35,31.37
  Bottom 0.813: DRIVER-RIGHT.BO1 38.35,31.37 39.62,29.72 44.7,29.72 45.72,30.48 45.85,33.02
OUT2-MOTOR-LEFT  (via drill 0.35 pad 1.78)
  Top 0.305: 40.77,54.74 40.83,54.8 | v18.29,23.24 18.54,23.24
  Top 0.813: 18.54,23.24 21.84,26.67 21.84,43.69 27.94,49.78 37.85,49.78 40.77,52.7 40.77,54.74 | 40.83,54.8 v40.77,54.86
  Bottom 0.305: 40.77,57.02 DRIVER-LEFT.BO2 | v18.29,23.24 18.29,23.11
  Bottom 0.508: MOTOR_LEFT.OUTA 19.94,6.48
  Bottom 0.813: DRIVER-LEFT.BO2 DRIVER-LEFT.AO2 | 19.94,6.48 11.68,14.73 11.68,16.51 18.29,23.11 | v40.77,54.86 40.77,57.02
OUT2-MOTOR-RIGHT  (via drill 0.35 pad 1.78)
  Top 0.508: 42.29,31.24 v42.04,31.75
  Top 0.813: 42.29,31.24 28.83,17.78 19.69,17.78 17.4,15.49 17.4,13.21 19.56,11.05 36.83,11.18 v37.72,10.16
  Bottom 0.508: MOTOR_RIGHT.OUTA 38.23,5.84 38.23,9.65 v37.72,10.16
  Bottom 0.813: DRIVER-RIGHT.BO2 40.89,33.27 v42.04,31.75 43.43,33.02 DRIVER-RIGHT.AO2
PUSH
  Top 0.152: RPUSH-2.2 92.58,72.14
  Top 0.305: PUSH.3 88.62,68.68 | 91.82,71.88 RPUSH-2.2
  Top 0.508: 88.62,68.68 91.82,71.88 | ARDUINO-MEGA.25 92.2,59.44 92.2,65.91 89.86,68.25 PUSH.3
PWM-MOTOR-LEFT  (via drill 0.6 pad 1.78)
  Top 0.305: ARDUINO-MEGA.44 85.6,31.11
  Top 0.508: 85.6,31.11 76.84,22.35 68.07,22.35 59.44,30.99 59.44,36.2
  Top 0.61: 59.44,36.2 59.44,36.7 58.93,37.21 53.85,37.21 v53.47,37.08
  Bottom 0.508: DRIVER-LEFT.PWMA 53.59,43.05 50.16,46.99 41.66,46.99 38.35,43.18 DRIVER-LEFT.PWMB
  Bottom 0.61: v53.47,37.08 DRIVER-LEFT.PWMA
PWM-MOTOR-RIGHT
  Top 0.305: ARDUINO-MEGA.46 86.11,28.57
  Top 0.508: DRIVER-RIGHT.PWMA 54.12,17.78 56.38,15.52 76.77,15.52 79.76,17.23 79.76,22.22 86.11,28.57
  Bottom 0.406: DRIVER-RIGHT.PWMB 38.35,20.19 42.16,24.26 51.44,24.26 53.59,21.84 DRIVER-RIGHT.PWMA
RESET  (via drill 0.35 pad 1.78)
  Top 0.508: HC-05-PROG.RESET 42.8,70.87 41.27,72.39 31.75,72.39 27.56,68.2 27.56,59.56 16.89,48.89 16.89,37.97 v17.53,37.34
  Bottom 0.508: HC-05-PROG.RESET 53.29,68.96 PUSH-RST.4 | ARDUINO-MEGA.RESET 25.27,23.75 19.94,29.08 19.94,34.92 v17.53,37.34
RX0
  Bottom 0.305: 37.59,69.09 HC-05-PROG.TXD | 41.53,66.93 41.53,70.99
  Bottom 0.508: ARDUINO-MEGA.0-RX0 55.75,63.12 54.74,64.14 53.47,64.14 51.82,65.79 42.67,65.79 41.53,66.93 | 41.53,70.99 40.39,72.14 38.73,72.14 37.59,70.99 37.59,69.09
RX2
  Bottom 0.508: U$9.E1 70.8,48.2 67.18,51.69 67.18,59.31 68.45,59.94 ARDUINO-MEGA.17-RX2
SCD
  Bottom 0.508: ARDUINO-MEGA.50 85.6,23.49 84.2,22.1 84.2,16.89 85.62,15.47 85.62,12.19 88.54,9.27 LINE-SENSOR.SCD
SCI
  Bottom 0.305: 97.16,21.97 LINE-SENSOR.SCI
  Bottom 0.508: 97.16,21.97 96.01,21.97 95.12,21.97 93.73,23.37 93.73,26.67 91.82,28.57 ARDUINO-MEGA.47
SCL
  Bottom 0.305: 58.8,74.55 58.8,74.68
  Bottom 0.508: ARDUINO-MEGA.21 78.61,63.37 76.07,65.91 69.09,65.91 65.53,69.47 65.53,70.48 63.63,72.39 60.96,72.39 58.8,74.55 | ADXL335-ACELEROMETER.SCL 58.8,74.68
SDA
  Bottom 0.305: 56.64,75.57 ADXL335-ACELEROMETER.SDA
  Bottom 0.508: ARDUINO-MEGA.20 76.07,63.25 74.42,64.9 68.33,64.9 64.13,68.83 59.31,68.83 58.93,69.47 58.93,71.88 56.64,75.57
SERVO1
  Top 0.305: ARDUINO-MEGA.37 89.54,41.27 | 92.21,43.94 DS1.C
  Top 0.508: 89.54,41.27 92.21,43.94
SERVO2
  Top 0.305: ARDUINO-MEGA.39 90.04,38.73 | 92.08,40.77 92.59,40.77 DS2.C
  Top 0.508: 90.04,38.73 92.08,40.77
SERVO3
  Top 0.305: ARDUINO-MEGA.41 89.92,36.2
  Top 0.508: DS3.C 91.31,37.59 89.92,36.2
SERVO4
  Top 0.305: 91.7,33.66 DS4.C
  Top 0.508: ARDUINO-MEGA.43 91.7,33.66
SF  (via drill 0.35 pad 1.78)
  Top 0.305: 91.31,6.6 v91.44,6.6
  Top 0.508: ARDUINO-MEGA.48 83.44,23.24 83.44,17.65 85.6,15.49 85.6,12.32 91.31,6.6
  Bottom 0.305: v91.44,6.6 91.57,6.73
  Bottom 0.508: 91.57,6.73 LINE-SENSOR.SF
SHARP-LEFT
  Bottom 0.508: SHARP-LEFT.DIST 51.69,9.52 53.21,11.05 55.12,11.05 55.75,11.68 U$14.A5
SHARP-MIDDLE
  Bottom 0.508: ARDUINO-MEGA.A6 58.29,11.3 62.48,7.11 SHARP-MIDDLE.DIST
SHARP-RIGHT
  Bottom 0.305: ARDUINO-MEGA.A7 60.83,12.19
  Bottom 0.508: 72.9,7.87 69.85,10.92 62.1,10.92 60.83,12.19
  Bottom 0.61: 72.9,7.87 SHARP-RIGHT.DIST
SID
  Bottom 0.305: 90.04,20.95 ARDUINO-MEGA.53 89.41,20.95 | LINE-SENSOR.SID 97.16,14.35 96.52,14.35 96.01,14.35
  Bottom 0.508: 89.41,20.95 96.01,14.35
SII
  Bottom 0.305: LINE-SENSOR.SII 98.55,16.89
  Bottom 0.508: ARDUINO-MEGA.51 90.81,23.49 91.19,23.11 91.19,21.46 95.76,16.89 LINE-SENSOR.SII
SSD
  Bottom 0.305: 86.74,20.95 ARDUINO-MEGA.52 | 87.76,17.25 87.76,19.94
  Bottom 0.508: LINE-SENSOR.SSD 95.63,11.81 91.21,16.23 88.77,16.23 87.76,17.25 | 87.76,19.94 86.74,20.95
SSI
  Bottom 0.508: ARDUINO-MEGA.49 91.57,26.04 92.46,25.15 92.46,22.22 95.25,19.43 LINE-SENSOR.SSI
TX0
  Bottom 0.305: ARDUINO-MEGA.1-TX0 53.21,62.1 | 40.13,68.83 HC-05-PROG.RXD
  Bottom 0.508: 53.21,62.1 51.05,64.26 41.66,64.26 40.13,65.79 40.13,68.83
TX2
  Bottom 0.508: U$9.E3 65.66,50.8 65.66,61.34 ARDUINO-MEGA.16-TX2
VCC  (via drill 0.35 pad 1.78)  (2 unrouted)
  Top 0.305: LED-PWR.A 91.98,74.58 | 70.1,74.75 DIPSW.8 | PUSH.1 84.1,69.27 | DRIVER-RIGHT.STBY 45.97,16.89
  Top 0.508: 84.1,69.27 86.72,71.88 89.28,71.88 91.98,74.58 | SERVO_1.VCC 106.81,51.44 111.12,55.75 111.12,64.29 109.43,67.1 BUZZER.+ | PUSH-RST.1 70.1,74.75 | 28.83,36.07 28.83,41.78 29.85,42.8 5V-SOURCE.OUT+ | v27.43,22.99 28.83,26.04 28.83,32.13 | 45.97,16.89 44.7,15.62 42.16,15.62 41.4,14.99 v41.4,8.25
  Top 0.61: 28.83,32.13 28.83,36.07 | DRIVER-RIGHT.VCC 50.93,36.2 50.04,37.08 47.24,37.08 45.85,38.48 DRIVER-LEFT.STBY 45.85,44.07 44.32,45.59 35.31,45.59 32.96,43.24 32.45,43.24 5V-SOURCE.OUT+
  Bottom 0.305: 73.03,75.57 DIPSW.7 | 106.68,40.13 106.81,40.26 SERVO_3.VCC 106.81,39.37 | SHARP-MIDDLE.VCC 67.56,4.57 | 77.85,6.22 SHARP-RIGHT.VCC | 98.17,24.51 LINE-SENSOR.VCC 97.28,24.51 | MOTOR_LEFT.VCC 22.48,4.57 | MOTOR_RIGHT.VCC 40.89,4.57 | DRIVER-LEFT.VCC 51.05,57.66 | 60.07,65.79 61.14,65.79 PUSH-RST.1 | 27.69,23.11 v27.43,22.99 | SW_FAN1.1 103.31,20.13 | 103.37,73.16 BUZZER.+
  Bottom 0.406: 39.19,63.68 39.19,60.19 | U$14.5V_1 30.35,20.07 27.69,23.11
  Bottom 0.508: 73.15,75.44 73.03,75.57 | DIPSW.5 DIPSW.6 DIPSW.7 DIPSW.8 ADXL335-ACELEROMETER.VCC | 39.19,63.68 37.47,65.41 34.29,65.41 32.64,67.06 HC-05-PROG.VCC | 39.19,60.19 39.95,59.44 50.67,59.44 51.05,59.05 DRIVER-LEFT.VCC | SERVO_1.VCC SERVO_2.VCC SERVO_3.VCC | DIPSW.5 84.1,69.19 PUSH.1 86.26,66.09 86.26,61.37 77.34,52.45 U$9.VCC | DIPSW.5 79.5,77.34 99.19,77.34 103.37,73.16 | 56.77,4.95 60.07,1.65 64.64,1.65 67.56,4.57 | SHARP-MIDDLE.VCC 67.56,4.7 70.48,1.78 75.06,1.78 77.85,4.57 77.85,5.71 77.85,6.22 | 106.81,35.05 SERVO_4.VCC 106.81,39.37 105.92,38.48 102.11,38.48 95,31.37 95,25.27 95.76,24.51 LINE-SENSOR.VCC 101.73,24.51 104.01,22.22 108.59,22.22 109.73,23.37 109.73,25.65 108.84,26.54 LED_1W.1 | U$14.5V_1 30.35,4.19 33.27,1.27 38.86,1.27 40.89,3.3 MOTOR_RIGHT.VCC 40.77,5.84 40.89,7.87 v41.4,8.25 | 22.48,4.57 24.51,2.54 28.57,2.54 30.29,4.25 | 40.89,4.57 44.2,1.27 53.09,1.27 56.77,4.95 | 51.05,57.66 52.7,59.31 56.9,59.31 58.17,60.58 58.17,63.88 60.07,65.79 | 103.06,20.13 103.76,20.83 103.76,22.22 | SW_FAN_AUX.1 100.84,11.43 99.82,12.45 99.82,18.41 101.54,20.13 103.06,20.13 | 103.06,20.13 103.31,20.13 | SHARP-LEFT.VCC 56.77,4.95
  Bottom 0.61: 5V-SOURCE.OUT+ 32.51,42.8 38.61,48.89 48.64,48.89 51.05,51.31 DRIVER-LEFT.VCC | C1.+ 80.66,2.9 77.85,5.71
VIN  (via drill 0.35 pad 1.78)
  Top 0.508: v33.66,16.26 34.8,15.49 38.99,15.49 39.75,14.73 39.75,8.89 38.86,7.87 31.88,7.87 30.35,6.48 30.35,3.43 28.83,1.9 13.84,1.9 9.4,6.35 9.4,25.02 MOTORS-SOURCE.IN+
  Bottom 0.508: ARDUINO-MEGA.VIN 37.97,14.99 37.34,15.62 34.67,15.62 v33.66,16.26
  Bottom 0.61: 2.97,51.51 2.84,51.64 | 7.87,71.63 7.87,75.82 9.91,77.85 15.62,77.85 16.07,77.41
  Bottom 0.813: 5V-SOURCE.IN+ 2.97,51.51 2.97,36.02 MOTORS-SOURCE.IN+ | 7.87,71.63 2.84,67.74 2.84,51.64 | 15.77,77.71 16.07,77.41 16.89,76.58 POWER-SW.P2

## Text on the board
Top: Acelerometer | gnd | On -> | PWR | Bluetooth Programer | Reset | gnd | gnd | gnd | vcc | Led1W | Fan2 | Fan1 | M-Left | Proteco-Hadware | Left | Midd | Right
Bottom: ProtecoHadware / 2019